# EAGLE board ir_remote_v2 (2) (EAGLE 9.6.2)
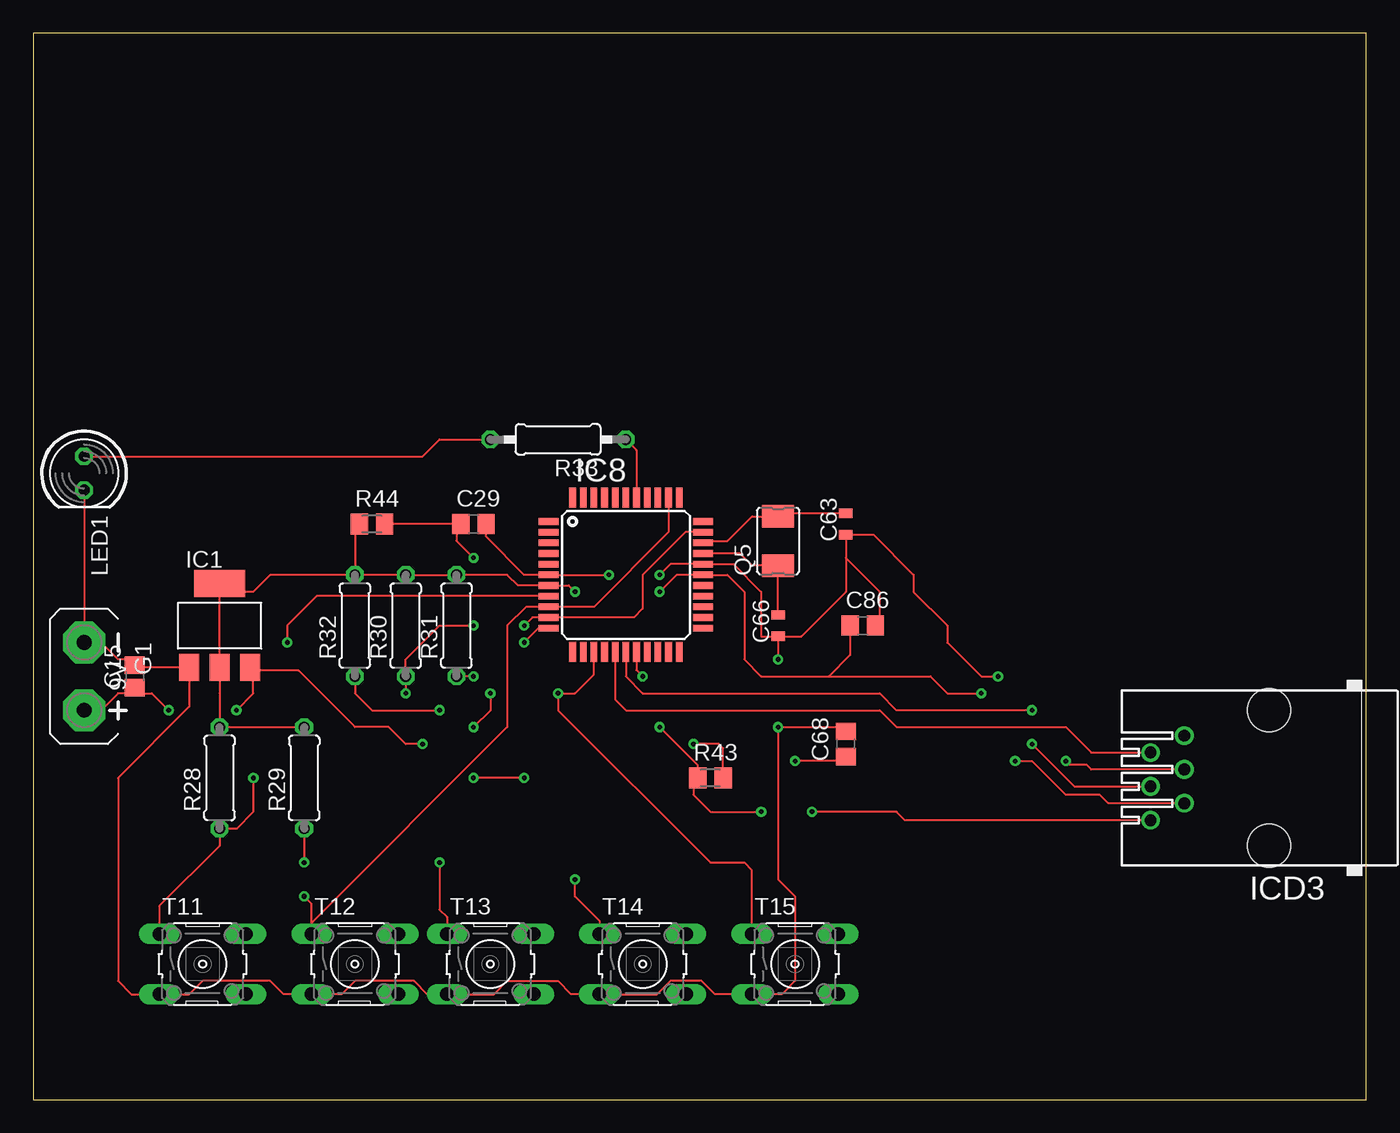
[diagram p0: board, top side]
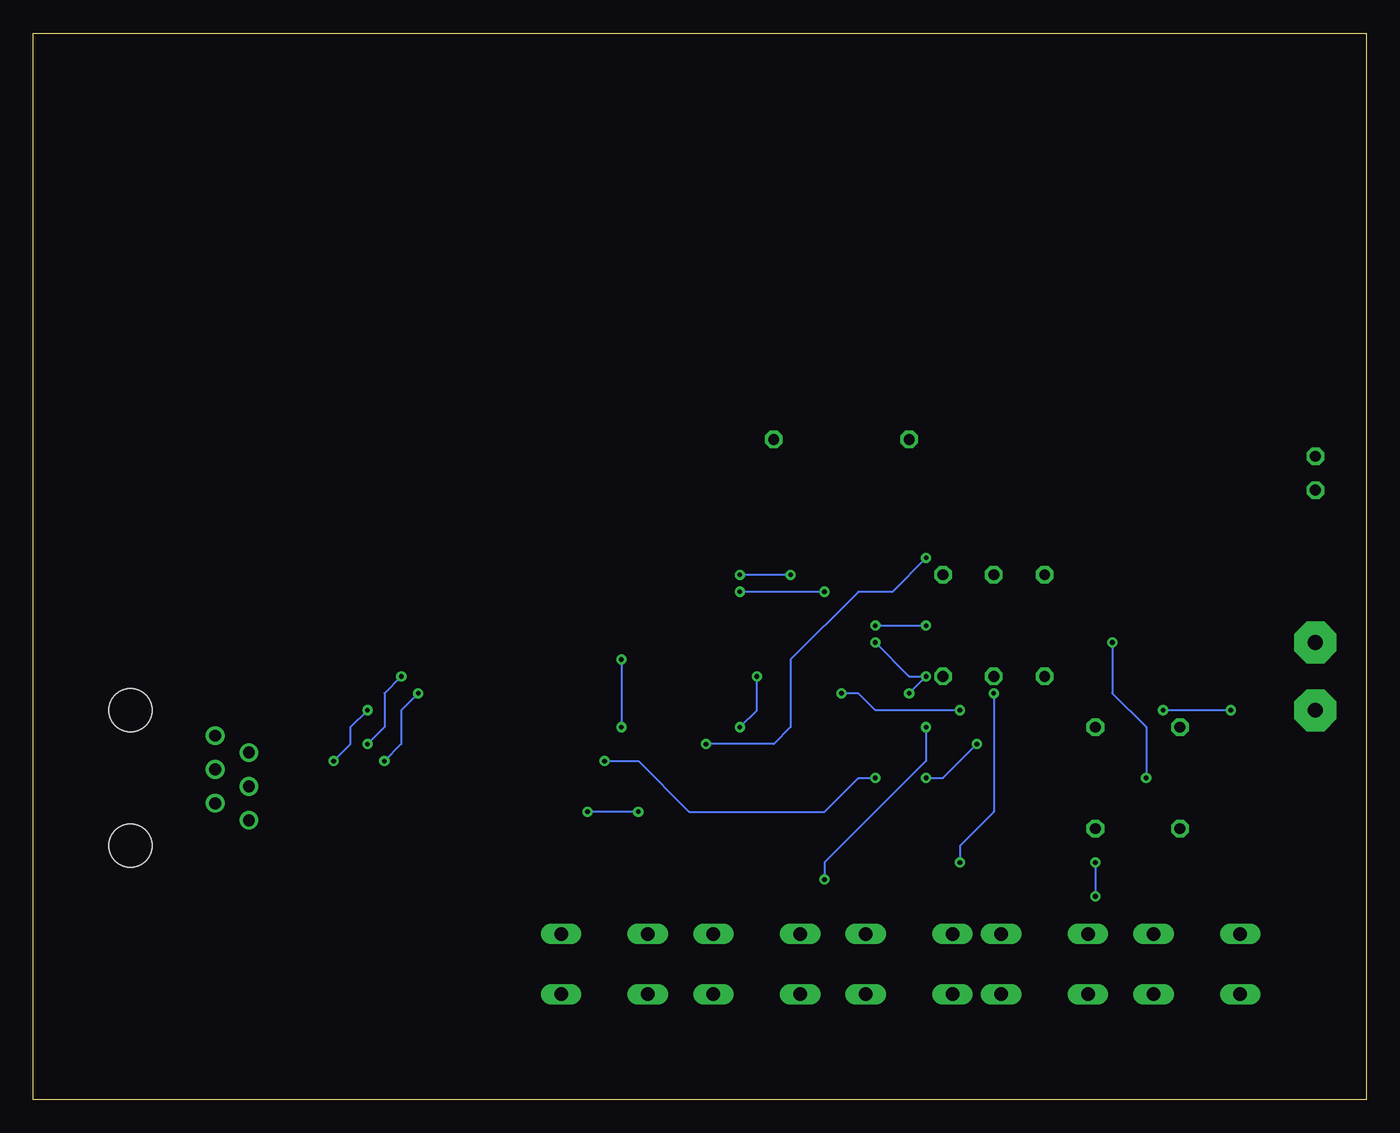
[diagram p1: board, bottom side, seen from below]

Size 100 x 80 mm. Coordinates in mm from the lower left corner, seen from the top.
Outline: 0,0 100,0 100,80 0,80 0,0
Copper layers (1*16): Top 0.035mm / dielectric 1.5mm / Bottom 0.035mm
Design rules "default": minimum track width 6mil, minimum drill 0.35mm, track to track 6mil, track to pad 6mil, pad to pad 6mil, via to via 6mil, smd to smd 6mil, copper to edge 40mil, drill to drill 6mil, minimum pad ring 10mil, minimum via ring 8mil, stop-mask expansion 4mil, vias tented up to drill 0mil, thermal gap 10mil

## Footprints (pad centres in the part's own frame; a part is rotated, then mirrored left to right if it is on the bottom)
C0805 = smd 1.3 x 1.5: 1 -0.85,0; 2 0.85,0
C0805' = smd 1.3 x 1.5: 1 -0.95,0; 2 0.95,0
C0603_WE = smd 0.7 x 1: 1 -0.8,0; 2 0.8,0
AB9V = drill 1.118 pad 3.15 octagon: + 0,2.54; - 0,-2.54
SOT223 = smd 1.499 x 2.007: 1 -2.261,-3.15; 2 0.025,-3.15; 3 2.311,-3.15 | smd 3.81 x 2.007: 4 0,3.15
TQFP44 = smd 1.5 x 0.5: 1 -5.8,4; 2 -5.8,3.2; 3 -5.8,2.4; 4 -5.8,1.6; 5 -5.8,0.8; 6 -5.8,0; 7 -5.8,-0.8; 8 -5.8,-1.6; 9 -5.8,-2.4; 10 -5.8,-3.2; 11 -5.8,-4; 23 5.8,-4; 24 5.8,-3.2; 25 5.8,-2.4; 26 5.8,-1.6; 27 5.8,-0.8; 28 5.8,0; 29 5.8,0.8; 30 5.8,1.6; 31 5.8,2.4; 32 5.8,3.2; 33 5.8,4 | smd 0.5 x 1.5: 12 -4,-5.8; 13 -3.2,-5.8; 14 -2.4,-5.8; 15 -1.6,-5.8; 16 -0.8,-5.8; 17 0,-5.8; 18 0.8,-5.8; 19 1.6,-5.8; 20 2.4,-5.8; 21 3.2,-5.8; 22 4,-5.8; 34 4,5.8; 35 3.2,5.8; 36 2.4,5.8; 37 1.6,5.8; 38 0.8,5.8; 39 0,5.8; 40 -0.8,5.8; 41 -1.6,5.8; 42 -2.4,5.8; 43 -3.2,5.8; 44 -4,5.8
520250-3 = drill 0.889: 1 -3.175,8.89; 2 -1.905,6.35; 3 -0.635,8.89; 4 0.635,6.35; 5 1.905,8.89; 6 3.175,6.35 | hole 3.251: -5.08,0; 5.08,0
LED5MM = drill 0.813 octagon: A -1.27,0; K 1.27,0
QUARZ_HC5032/2 = smd 1.7 x 2.4: 1 -1.85,0; 2 1.85,0
0207/7 = drill 0.813 octagon: 1 -3.81,0; 2 3.81,0
0207/10 = drill 0.813 octagon: 1 -5.08,0; 2 5.08,0
M0805 = smd 1.3 x 1.6: 1 -0.95,0; 2 0.95,0
TASTER3301 = drill 1.016 long: 1 -3.251,2.261; 2 3.251,2.261; 3 -3.251,-2.261; 4 3.251,-2.261

## Placement (x,y rotation side)
C15  100n  [C0805]  7.62,31.75 90 top
C29  100n  [C0805']  33.02,43.18 0 top
C63  22p  [C0603_WE]  60.96,43.18 90 top
C66  22p  [C0603_WE]  55.88,35.56 90 top
C68  10u  [C0805']  60.96,26.67 90 top
C86  10u  [C0805']  62.23,35.56 0 top
G1  AB9V  [AB9V]  3.81,31.75 180 top
IC1  AP1117E50G  [SOT223]  13.97,35.56 0 top
IC8  [TQFP44]  44.45,39.37 0 top
ICD3  [520250-3]  92.71,24.13 90 top
LED1  [LED5MM]  3.81,46.99 270 top
Q5  10MHz  [QUARZ_HC5032/2]  55.88,41.91 90 top
R28  10k  [0207/7]  13.97,24.13 90 top
R29  10k  [0207/7]  20.32,24.13 90 top
R30  10k  [0207/7]  27.94,35.56 90 top
R31  10k  [0207/7]  31.75,35.56 90 top
R32  10k  [0207/7]  24.13,35.56 90 top
R33  1k  [0207/10]  39.37,49.53 180 top
R43  470  [M0805]  50.8,24.13 0 top
R44  10k  [M0805]  25.4,43.18 0 top
T11  TASTER3301  [TASTER3301]  12.7,10.16 0 top
T12  TASTER3301  [TASTER3301]  24.13,10.16 0 top
T13  TASTER3301  [TASTER3301]  34.29,10.16 0 top
T14  TASTER3301  [TASTER3301]  45.72,10.16 0 top
T15  TASTER3301  [TASTER3301]  57.15,10.16 0 top

## Library data of the parts
C15 = rcl_416
C29 C63 C66 C68 C86 R28-R32 R43 R44 = rcl
G1 = battery
IC1 = Bernd_110428
IC8 Q5 T11-T15 = Bernd
ICD3 = con-amp
LED1 = led
R33 = resistor

## Nets
+9V: C15.1 C68.1 G1.+ IC1.3
D0_LCD: IC8.27
D1_LCD: IC8.26
GND: C15.2 C29.2 C63.1 C66.1 C68.2 C86.2 G1.- IC1.1 IC8.6 IC8.29 ICD3.3 LED1.K T11.3 T12.3 T13.3 T14.3 T15.3
MCLR: IC8.18 ICD3.1 R43.1
N$19: LED1.A R33.2
N$24: C29.1 R43.2 R44.2
N$47: C66.2 IC8.30 Q5.1
N$48: C63.2 IC8.31 Q5.2
RB0: IC8.8 R28.1 T11.1
RB1: IC8.9 IC8.35 R29.1 T12.1
RB2: IC8.10 IC8.32 R30.1 T13.1
RB3: IC8.11 R31.1 T14.1
RB4: IC8.14 R32.1 T15.1
RB5: IC8.15
RB6: IC8.16 ICD3.5
RB7: IC8.17 ICD3.4
RD0_LED: IC8.38 R33.1
RDS_INT: IC8.36
VCC: C86.1 IC1.2 IC1.4 IC8.7 IC8.28 ICD3.2 R28.2 R29.2 R30.2 R31.2 R32.2 R44.1

## Tracks (layer width: path | path; a pad name or v marks a point on that pad's centre or on a via)
+9V  (via drill 0.35)
  Top 0.152: G1.+ 5.08,29.21 6.35,30.48 7.2,30.48 C15.1 8.04,30.48 8.89,30.48 v10.16,29.21 | v15.24,29.21 16.51,30.48 16.51,32.18 | 16.51,32.18 IC1.3 | C68.1 60.64,25.4 v57.15,25.4 | v36.83,24.13 v33.02,24.13 | v29.21,26.67 27.94,26.67 26.67,27.94 24.13,27.94 19.89,32.18 16.51,32.18
  Bottom 0.152: v10.16,29.21 v15.24,29.21 | v57.15,25.4 54.61,25.4 50.8,21.59 40.64,21.59 38.1,24.13 v36.83,24.13 | v33.02,24.13 31.75,24.13 v29.21,26.67
GND  (via drill 0.35)
  Top 0.152: C66.1 54.61,34.76 54.61,38.1 52.54,40.17 IC8.29 47.79,40.17 v46.99,39.37 | C66.1 57.62,34.76 60.96,38.1 60.96,40.64 | 60.96,40.64 C63.1 63.03,42.38 66.04,39.37 66.04,38.1 68.58,35.56 68.58,34.29 71.12,31.75 v72.39,31.75 | v43.18,39.37 IC8.6 36.83,39.37 33.97,42.23 C29.2 | ICD3.3 78.11,23.5 v74.93,26.67 | C66.1 v55.88,33.02 | C86.2 63.5,35.88 63.5,38.1 60.96,40.64 | C68.2 60.64,27.94 v55.88,27.94 55.88,16.51 57.15,15.24 57.15,8.89 56.16,7.9 T15.3 51.13,7.9 50.14,8.89 47.8,8.89 46.81,7.9 T14.3 40.36,7.9 39.37,8.89 35.56,8.89 34.57,7.9 T13.3 | LED1.K G1.- 5.08,34.29 6.35,33.02 7.2,33.02 C15.2 7.81,32.41 IC1.1 11.71,29.49 6.35,24.13 6.35,8.89 7.34,7.9 T11.3 11.71,7.9 12.7,8.89 17.78,8.89 18.77,7.9 T12.3 23.14,7.9 24.13,8.89 28.55,8.89 29.54,7.9 T13.3 | 30.2,7.9 T13.3
  Bottom 0.152: v43.18,39.37 v46.99,39.37 | v72.39,31.75 73.66,30.48 73.66,27.94 v74.93,26.67 | v55.88,33.02 v55.88,27.94
MCLR  (via drill 0.35)
  Top 0.152: IC8.18 45.25,32.22 v45.72,31.75 | v46.99,27.94 49.85,25.08 R43.1 49.53,23.81 49.53,22.86 50.8,21.59 v54.61,21.59 | v58.42,21.59 64.77,21.59 65.41,20.95 ICD3.1
  Bottom 0.152: v46.99,27.94 45.72,29.21 v45.72,31.75 | v54.61,21.59 v58.42,21.59
N$19
  Top 0.152: LED1.A 29.21,48.26 30.48,49.53 R33.2
N$24  (via drill 0.35)
  Top 0.152: R44.2 C29.1 31.75,42.86 31.75,41.91 v33.02,40.64 | R43.2 51.75,26.35 51.43,26.67 v49.53,26.67
  Bottom 0.152: v33.02,40.64 35.56,38.1 38.1,38.1 43.18,33.02 43.18,27.94 44.45,26.67 v49.53,26.67
N$47
  Top 0.152: IC8.30 53.01,40.97 53.92,40.06 Q5.1 C66.2
N$48
  Top 0.152: IC8.31 50.39,41.91 52.07,41.91 53.92,43.76 Q5.2 56.1,43.98 C63.2
RB0  (via drill 0.35)
  Top 0.152: 9.45,13.26 T11.1 9.45,14.53 13.97,19.05 R28.1 15.24,20.32 16.51,21.59 v16.51,24.13 | IC8.8 21.26,37.77 19.05,35.56 v19.05,34.29
  Bottom 0.152: v19.05,34.29 19.05,30.48 16.51,27.94 v16.51,24.13
RB1  (via drill 0.35)
  Top 0.152: IC8.35 47.65,42.57 42.05,36.97 IC8.9 36.97,36.97 35.56,35.56 35.56,27.94 20.88,13.26 T12.1 20.88,14.68 v20.32,15.24 | R29.1 v20.32,17.78
  Bottom 0.152: v20.32,17.78 v20.32,15.24
RB2  (via drill 0.35)
  Top 0.152: IC8.32 48.92,42.57 45.72,39.37 45.72,36.83 45.06,36.17 IC8.10 37.44,36.17 v36.83,35.56 | v33.02,35.56 30.48,35.56 27.94,33.02 R30.1 v27.94,30.48 | T13.1 31.04,13.69 30.48,14.25 v30.48,17.78
  Bottom 0.152: v36.83,35.56 v33.02,35.56 | v27.94,30.48 27.94,21.59 30.48,19.05 v30.48,17.78
RB3  (via drill 0.35)
  Top 0.152: IC8.11 37.91,35.37 v36.83,34.29 | v33.02,31.75 R31.1 | v34.29,30.48 34.29,29.21 v33.02,27.94 | T14.1 42.47,13.41 40.64,15.24 v40.64,16.51
  Bottom 0.152: v36.83,34.29 34.29,31.75 v33.02,31.75 v34.29,30.48 | v33.02,27.94 33.02,25.4 40.64,17.78 v40.64,16.51
RB4  (via drill 0.35)
  Top 0.152: R32.1 24.13,30.48 25.4,29.21 v30.48,29.21 | IC8.14 42.05,31.89 40.64,30.48 v39.37,30.48 39.37,29.21 50.8,17.78 53.34,17.78 53.9,17.22 T15.1
  Bottom 0.152: v30.48,29.21 36.83,29.21 38.1,30.48 v39.37,30.48
RB6
  Top 0.152: IC8.16 43.65,30.01 44.45,29.21 63.5,29.21 64.77,27.94 77.47,27.94 79.38,26.04 ICD3.5
RB7  (via drill 0.35)
  Top 0.152: IC8.17 44.45,31.75 45.72,30.48 63.5,30.48 64.77,29.21 v74.93,29.21 | ICD3.4 79.38,24.77 79.03,25.11 77.76,25.11 v77.47,25.4
  Bottom 0.152: v77.47,25.4 76.2,26.67 76.2,27.94 v74.93,29.21
RD0_LED
  Top 0.152: R33.1 45.25,48.73 IC8.38
VCC  (via drill 0.35)
  Top 0.152: v40.64,38.1 40.17,38.57 IC8.7 36.36,38.57 35.56,39.37 R31.2 R30.2 R32.2 | v46.99,38.1 48.26,39.37 IC8.28 52.07,39.37 53.34,38.1 53.34,33.02 54.61,31.75 59.69,31.75 | R32.2 17.78,39.37 16.51,38.1 13.97,38.1 IC1.4 13.97,32.44 IC1.2 13.99,30.5 13.97,30.48 R28.2 R29.2 | 59.69,31.75 67.31,31.75 68.58,30.48 v71.12,30.48 | v73.66,25.4 74.93,25.4 77.47,22.86 80.01,22.86 80.64,22.23 ICD3.2 | C86.1 61.28,33.34 59.69,31.75 | R44.1 24.13,42.86 R32.2
  Bottom 0.152: v40.64,38.1 v46.99,38.1 | v71.12,30.48 72.39,29.21 72.39,26.67 v73.66,25.4